# EAGLE board uv-light-sensor (EAGLE 6.5.0)
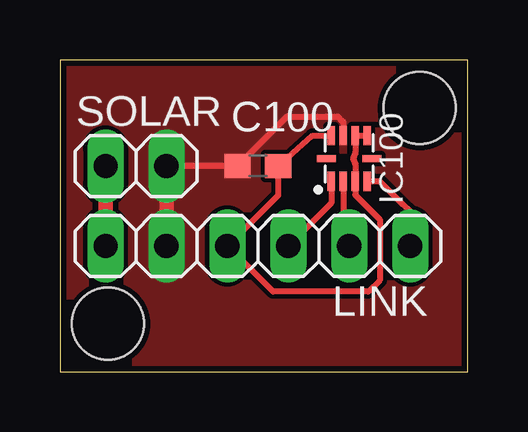
[diagram p0: board, top side]

Size 17 x 13 mm. Coordinates in mm from the lower left corner, seen from the top.
Outline: 0,0 17,0 17,13 0,13 0,0
Copper layers (1*16): Top 0.035mm / dielectric 1.55mm / Bottom 0.035mm
Design rules "eC_2Layer_PClass6_BaseCopperO35": minimum track width 0.15mm, minimum drill 0.35mm, track to track 0.175mm, track to pad 0.175mm, pad to pad 0.175mm, via to via 0.175mm, smd to smd 0mil, copper to edge 0.25mm, drill to drill 0.35mm, minimum pad ring 0.175mm, minimum via ring 0.125mm, stop-mask expansion 0mil, vias tented up to drill 0.45mm, thermal gap 0.2mm
Holes 3 mm at 15,11 2,2

## Footprints (pad centres in the part's own frame; a part is rotated, then mirrored left to right if it is on the bottom)
C0603 = smd 1.1 x 1: 1 -0.85,0; 2 0.85,0
QFN-10/2MM = smd 0.8 x 0.3: 1 -0.95,0.75; 2 -0.95,0.25; 3 -0.95,-0.25; 4 -0.95,-0.75; 6 0.95,-0.75; 7 0.95,-0.25; 8 0.95,0.25; 9 0.95,0.75 | smd 0.3 x 0.8: 5 0,-0.95; 10 0,0.95
1X06 = drill 1.016 long: 1 -6.35,0; 2 -3.81,0; 3 -1.27,0; 4 1.27,0; 5 3.81,0; 6 6.35,0
1X02 = drill 1.016 long: 1 -1.27,0; 2 1.27,0

## Placement (x,y rotation side)
C100  100n  [C0603]  8.26,8.57 0 top
IC100  SI1147  [QFN-10/2MM]  12.06,8.89 90 top
LINK  [1X06]  8.26,5.24 0 top
SOLAR  [1X02]  3.17,8.57 180 top

## Library data of the parts
C100 = rcl
IC100 = weather_station; DIGIKEY: 336-2624-1-ND
LINK SOLAR = pinhead

## Nets
GND: C100.1 IC100.8 LINK.2 SOLAR.1
N$1: IC100.4 LINK.6
N$2: IC100.2 LINK.5
N$3: IC100.1 LINK.4
N$4: LINK.1 SOLAR.2
VCC: C100.2 IC100.3 IC100.6 IC100.7 IC100.9 LINK.3

## Tracks (layer width: path | path; a pad name or v marks a point on that pad's centre or on a via)
GND
  Top 0.254: SOLAR.1 C100.1 9.47,10.64 11.11,10.64 11.59,10.64 11.75,10.48 11.81,10.41 IC100.8
  Top 0.61: LINK.2 SOLAR.1
  pour Top (no thermals): 0,13 0,0 17,0 17,13
N$1
  Top 0.254: IC100.4 13.33,7.94 14.29,6.99 14.61,6.67 LINK.6
N$2
  Top 0.254: IC100.2 11.81,5.49 LINK.5
N$3
  Top 0.254: IC100.1 11.31,7.03 LINK.4
N$4
  Top 0.61: LINK.1 SOLAR.2
VCC
  Top 0.254: IC100.6 IC100.7 12.31,9.14 12.22,8.89 12.31,8.64 IC100.3 12.31,7.37 13.34,6.35 13.34,3.81 12.86,3.33 8.89,3.33 8.73,3.49 LINK.3 9.11,7.36 C100.2 10.53,9.84 IC100.9